# EAGLE board protomesure2 (EAGLE 8.2.0)
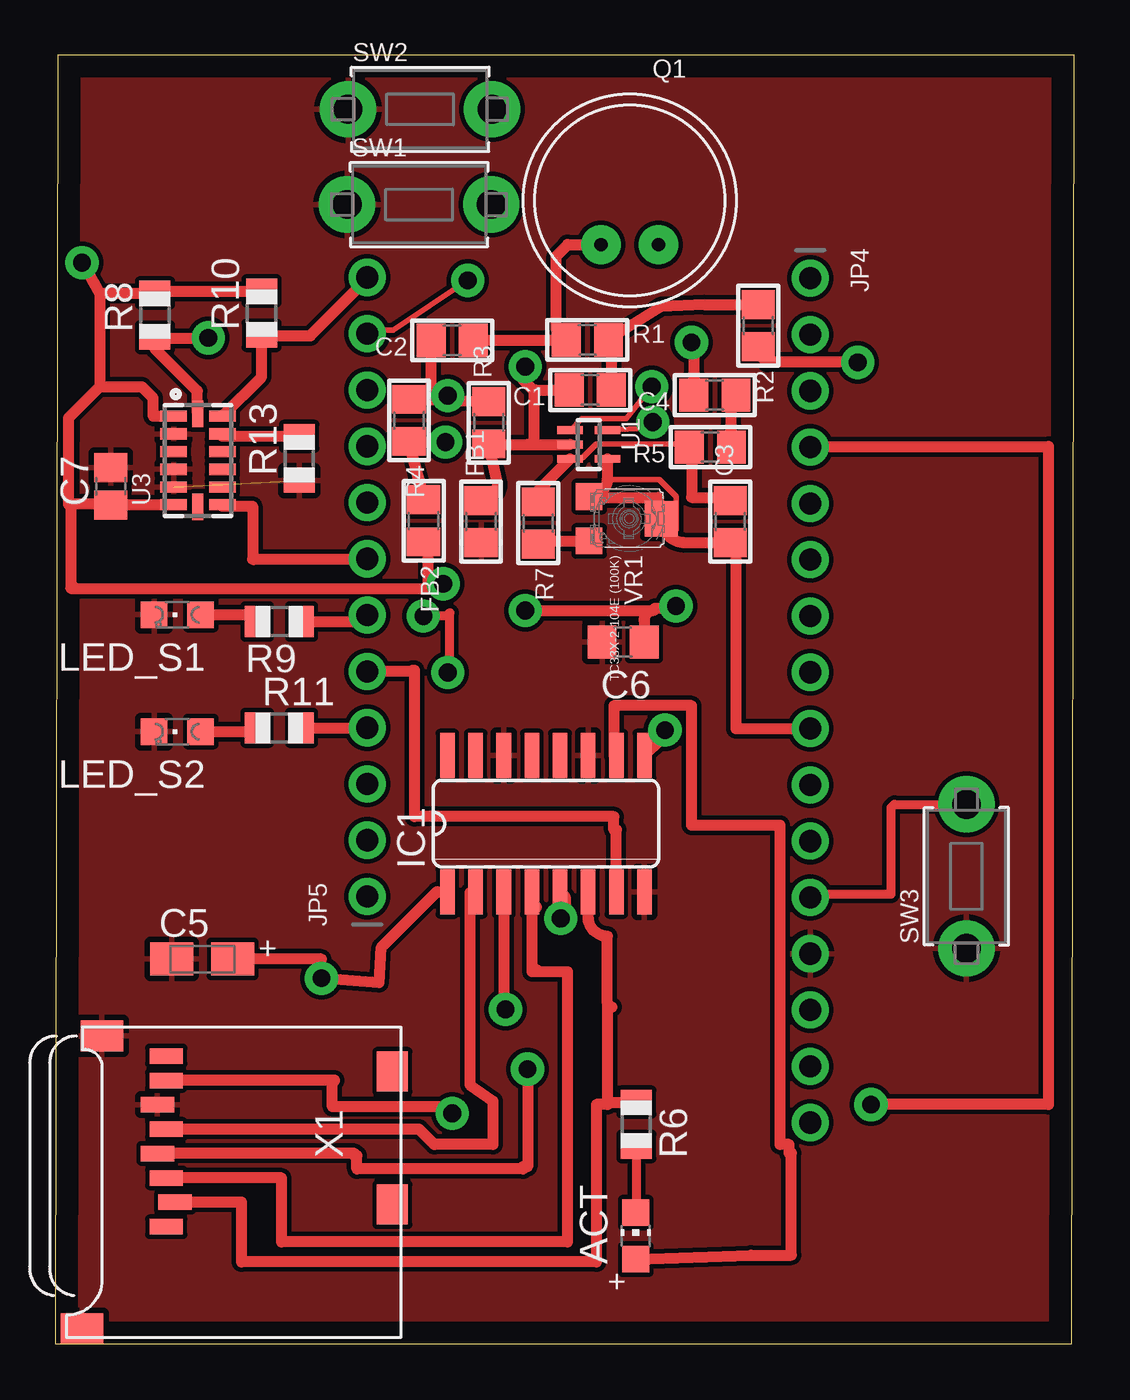
[diagram p0: board, top side]
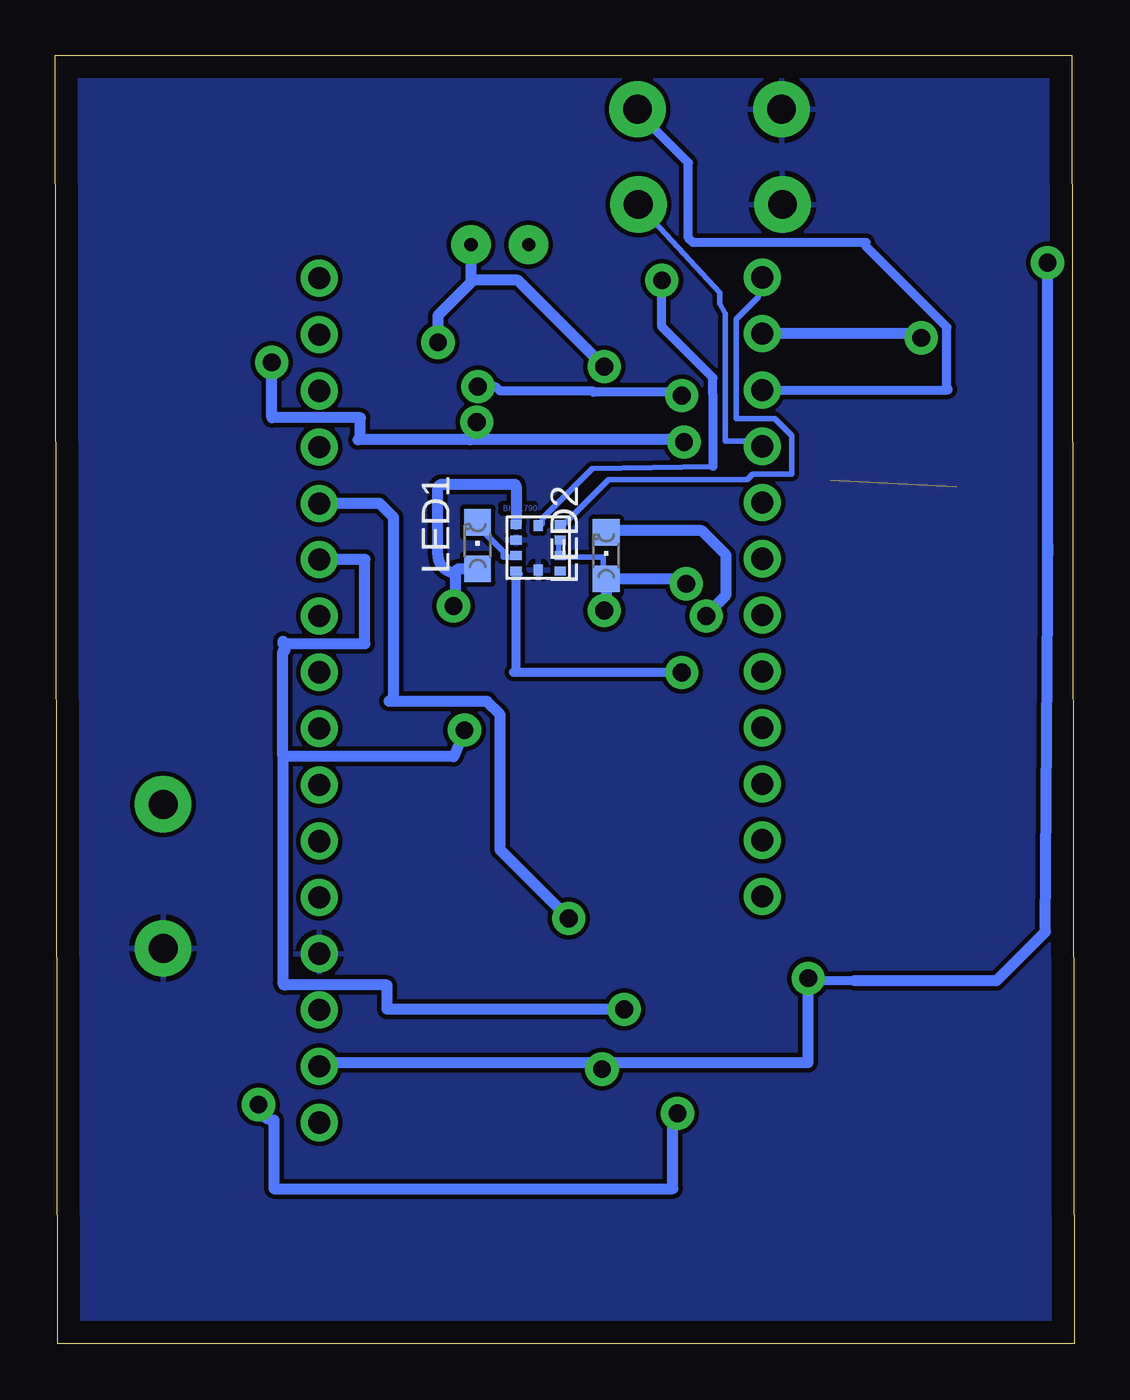
[diagram p1: board, bottom side, seen from below]

Size 45.96 x 58.15 mm. Coordinates in mm from the lower left corner, seen from the top.
Outline: 0,0 45.86,0 45.96,58.15 0.1,58.15 0,0
Copper layers (1*16): Top 0.035mm / dielectric 1.5mm / Bottom 0.035mm
Design rules "default": minimum track width 10mil, minimum drill 24mil, track to track 8mil, track to pad 8mil, pad to pad 8mil, via to via 8mil, smd to smd 8mil, copper to edge 40mil, drill to drill 8mil, minimum pad ring 10mil, minimum via ring 8mil, stop-mask expansion 4mil, vias tented up to drill 0mil, thermal gap 10mil

## Footprints (pad centres in the part's own frame; a part is rotated, then mirrored left to right if it is on the bottom)
CHIP-LED0805 = smd 1.2 x 1.2: A 0,-1.05; C 0,1.05
0805 = smd 1.3 x 1.5: 1 -0.95,0; 2 0.95,0
A/3216-18R = smd 1.95 x 1.5: + 1.375,0; - -1.375,0
C0805 = smd 1.3 x 1.5: 1 -0.95,0; 2 0.95,0
C0805' = smd 1.3 x 1.5: 1 -0.85,0; 2 0.85,0
SO16 = smd 0.66 x 2.032: 1 -4.445,-3.073; 2 -3.175,-3.073; 3 -1.905,-3.073; 4 -0.635,-3.073; 5 0.635,-3.073; 6 1.905,-3.073; 7 3.175,-3.073; 8 4.445,-3.073; 9 4.445,3.073; 10 3.175,3.073; 11 1.905,3.073; 12 0.635,3.073; 13 -0.635,3.073; 14 -1.905,3.073; 15 -3.175,3.073; 16 -4.445,3.073
1X16_ROUND = drill 1 pad 1.676: 1 -19.05,0; 2 -16.51,0; 3 -13.97,0; 4 -11.43,0; 5 -8.89,0; 6 -6.35,0; 7 -3.81,0; 8 -1.27,0; 9 1.27,0; 10 3.81,0; 11 6.35,0; 12 8.89,0; 13 11.43,0; 14 13.97,0; 15 16.51,0; 16 19.05,0
1X12_ROUND = drill 1 pad 1.676: 1 -13.97,0; 2 -11.43,0; 3 -8.89,0; 4 -6.35,0; 5 -3.81,0; 6 -1.27,0; 7 1.27,0; 8 3.81,0; 9 6.35,0; 10 8.89,0; 11 11.43,0; 12 13.97,0
CHIPLED_0805 = smd 1.2 x 1.2: A 0,-1.05; C 0,1.05
ELECTRET_9.7 = drill 0.6 pad 1.778: + 1.3,2; - -1.3,2
R0805 = smd 1.1 x 1.4: 1 -1,0; 2 1,0
TACT_PANA-EVQ = drill 1.3 pad 2.54: P$1 -3.25,0; P$2 3.25,0
SC70-5 = smd 0.35 x 1.15: 1 -0.65,-0.85; 2 0,-0.85; 3 0.65,-0.85; 4 0.65,0.85; 5 -0.65,0.85
LGA14 = smd 0.5 x 1.2: 1 2,1.1; 2 1.2,1.1; 3 0.4,1.1; 4 -0.4,1.1; 5 -1.2,1.1; 6 -2,1.1; 8 -2,-1.1; 9 -1.2,-1.1; 10 -0.4,-1.1; 11 0.4,-1.1; 12 1.2,-1.1; 13 2,-1.1 | smd 1.2 x 0.5: 7 -2.1,0; 14 2.1,0
BH1790 = smd 0.5 x 0.4: GND -1,0.35; LED1 -1,-0.35; LED2 -1,-1.05; SDA 1,1.05; TEST2 1,-0.35; TEST3 1,-1.05; VCC -1,1.05; VCC2 1,0.35 | smd 0.4 x 0.5: SCL 0,1; TEST1 0,-1
TRIMPOT_BOURNS_TC33X-2 = smd 1.2 x 1.2: 1 -1,-1.8; 3 1,-1.8 | smd 1.6 x 1.5: 2 0,1.45
MICROSD = smd 0.7 x 1.5: 1 9,-10.64; 2 7.9,-10.24; 3 6.8,-10.64; 4 5.7,-11.04; 5 4.6,-10.64; 6 3.5,-11.04; 7 2.4,-10.64; 8 1.3,-10.64 | smd 1.8 x 1.4: CD1 2,-0.44; CD2 8,-0.44 | smd 1.4 x 1.9: MT1 0.4,-13.54; MT2 13.6,-14.44

## Placement (x,y rotation side)
ACT  RED  [CHIP-LED0805]  26.18,4.87 0 top
C1  0.1µF  [0805]  24.13,43.05 180 top
C2  0.01uF  [0805]  17.9,45.29 180 top
C3  100pF  [0805]  30.45,37.11 90 top
C4  10uF  [0805]  29.75,42.82 180 top
C5  10uF/10V  [A/3216-18R]  6.62,17.37 0 top
C6  [C0805]  25.61,31.67 180 top
C7  0.1uF  [C0805']  2.5,38.7 90 top
FB1  FERRITE  [0805]  19.2,37.11 90 top
FB2  FERRITE  [0805]  16.61,37.15 270 top
IC1  4050D  [SO16]  22.13,23.48 0 top
JP4  [1X16_ROUND]  34.05,29.04 270 top
JP5  [1X12_ROUND]  14.07,34.16 90 top
LED1  [CHIPLED_0805]  26.91,36.03 0 bottom
LED2  [CHIPLED_0805]  21.11,35.57 0 bottom
LED_S1  [CHIPLED_0805]  5.5,32.91 90 top
LED_S2  [CHIPLED_0805]  5.5,27.63 90 top
Q1  CMA-4544PF-W  [ELECTRET_9.7]  25.91,51.61 180 top
R1  1K  [0805]  24,45.31 0 top
R2  1K  [0805]  31.71,45.95 270 top
R3  1M  [0805]  19.55,41.57 90 top
R4  1M  [0805]  15.95,41.68 270 top
R5  1K  [0805]  29.55,40.47 180 top
R6  1K  [R0805]  26.21,9.91 270 top
R7  22K  [0805]  21.78,37.05 270 top
R8  10K  [R0805]  4.49,46.43 90 top
R9  10K  [R0805]  10.1,32.6 180 top
R10  10K  [R0805]  9.3,46.52 90 top
R11  10K  [R0805]  10.1,27.8 0 top
R13  10K  [R0805]  11,39.96 90 top
SW1  [TACT_PANA-EVQ]  16.41,51.42 0 top
SW2  [TACT_PANA-EVQ]  16.45,55.72 0 top
SW3  [TACT_PANA-EVQ]  41.1,21.1 90 top
U1  MAX4466EXK+T  [SC70-5]  24.06,40.59 270 top
U3  [LGA14]  6.43,39.87 90 top
U$31  BH1790  [BH1790]  24.18,35.93 0 bottom
VR1  TC33X-2-104E (100K)  [TRIMPOT_BOURNS_TC33X-2]  25.88,37.24 270 top
X1  MICROSD  [MICROSD]  15.64,14.29 270 top

## Library data of the parts
ACT C5 C7 LED1 LED2 LED_S1 LED_S2 R6 R8-R11 R13 SW1-SW3 X1 = adafruit
C1-C4 FB1 FB2 JP4 JP5 Q1 R1-R5 R7 U1 U3 VR1 = microbuilder
C6 = resistor
IC1 = 40xx
U$31 = quentin

## Nets
!RESET: JP4.16
+3V3: C5.+ C6.1 C7.1 FB2.2 IC1.1 JP4.15 LED1.A LED2.A R8.2 R10.2 U3.1 U3.6 U$31.TEST2 U$31.VCC U$31.VCC2 X1.4
A0: JP4.12 SW3.P$2
A1: JP4.11
A2: JP4.10
A3: C3.1 JP4.9 U1.4 VR1.1 VR1.2
A4: JP4.8
A5: JP4.7
AGND: C1.2 C4.2 FB1.2 Q1.- R3.1 U1.2
AREF: JP4.14
AVCC: FB2.1 R2.2 R4.2 U1.5
D0: JP4.3
D1: JP4.2
D5: JP5.10 SW2.P$2
D6: JP5.9 SW1.P$2
D9: JP5.8
D10: JP5.7 U3.8
D11: JP5.6 R9.1
D12: IC1.7 JP5.5
D13: JP5.4 R11.2
DFU: JP4.1
EN: JP5.2
GND: C5.- C6.2 C7.2 FB1.1 IC1.8 IC1.11 IC1.14 JP4.13 LED_S1.C LED_S2.C R13.1 SW1.P$1 SW2.P$1 SW3.P$1 U3.2 U3.4 U3.5 U$31.GND U$31.TEST1 X1.6 X1.MT1 X1.MT2
INT2: U3.9
MISO: JP4.4 X1.7
MOSI: IC1.5 JP4.5
N$1: C3.2 R5.2 R7.1 U1.3
N$2: R7.2 VR1.3
N$3: C2.1 Q1.+ R1.1
N$4: C1.1 R1.2 R2.1
N$5: C2.2 R3.2 R4.1 U1.1
N$6: LED1.C U$31.LED1
N$7: C4.1 R5.1
N$8: ACT.A IC1.10
N$9: IC1.2 X1.5
N$10: IC1.6 R6.1 X1.2
N$11: ACT.C R6.2
N$12: IC1.4 X1.3
N$14: LED2.C U$31.LED2
N$15: LED_S1.A R9.2
N$16: LED_S2.A R11.1
SCK: IC1.3 IC1.9 JP4.6
SCL: JP5.11 R8.1 U3.14 U$31.SCL
SDA: JP5.12 R10.1 U3.13 U$31.SDA
SDO/ADDR: R13.2 U3.12
VBAT: JP5.1
VBUS: JP5.3

## Tracks (layer width: path | path; a pad name or v marks a point on that pad's centre or on a via)
+3V3  (via drill 0.8 pad 1.5)
  Top 0.254: FB2.2 16.75,36 16.75,35.75 16.8,35.6
  Top 0.5: U3.6 2.52,37.87 C7.1 2.45,37.9 0.6,37.9 | 0.6,37.9 0.6,41.8 2,43.2 | 2,43.2 3.9,43.2 4.4,42.7 4.4,41.9 4.43,41.87 U3.1 | 2,47.4 2,43.2 | 2,47.4 2.03,47.43 R8.2 4.58,47.52 R10.2 | v1.2,48.8 2,47.4 | 0.6,37.9 arc-90 0.7,37.8 0.7,34.1 | 0.7,34.1 arc-90 0.8,34.2 | 16.8,35.6 16.8,34.3 16.9,34.3 17.5,34.4 | IC1.1 17.21,20.41 14.7,17.9 14.6,16.3 v12,16.5 12,17.37 C5.+ | 17.5,34.4 v17.5,34.3 | v21.2,33.1 27,33.1 | 27,33.1 arc90 26.56,32.66 C6.1 | 27,33.1 arc-90 27.1,33.2 28.1,33.2 arc-90 v28,33.3 | v21.3,12.4 21.3,8 21.1,8 21.1,7.9 13.6,7.9 13.6,8.5 13.5,8.5 13.5,8.59 X1.4 | 0.7,34.1 17.2,34.1 17.5,34.4
  Bottom 0.254: U$31.VCC2 23.25,36.25 23.25,35.75 U$31.TEST2 23,35.5 21.25,35.5 21.25,34.75 LED2.A
  Bottom 0.406: v12,16.5 12,16.4 9.9,16.4
  Bottom 0.5: 34,12.4 34.1,12.5 34.08,12.5 JP4.15 34.05,12.7 21.2,12.7 | 21.2,12.7 12,12.7 v12,16.5 | 1.2,36.1 1.2,35.6 | 1.2,36.1 v1.2,48.8 | v17.5,34.3 17.72,34.52 LED2.A 21.11,33.2 21.3,33.2 arc90 v21.2,33.1 | v28,33.3 arc-90 27.9,33.4 27.9,34.8 | 27.9,34.8 arc90 27.72,34.98 LED1.A | 27.9,34.8 arc90 28.7,35.6 28.7,38.6 arc90 28.5,38.8 25.3,38.8 arc90 25.18,38.68 U$31.VCC | 21.2,12.7 21.2,12.4 v21.3,12.4 | 9.9,16.4 3.5,16.4 1.3,18.6 1.2,33.4 1.2,36.1
A0
  Top 0.406: JP4.12 34.2,20.3 37.7,20.3 37.7,24.2 37.85,24.35 SW3.P$2
A3
  Top 0.254: 24.91,39.07 25,39 27.25,39 28,38.25 28,36.75 27.75,36.75 VR1.2
  Top 0.5: VR1.2 arc90 28.41,36.16 C3.1 30.7,35.91 30.7,27.77 JP4.9 | VR1.1 arc90 24.91,39.07 U1.4
AGND  (via drill 0.8 pad 1.5)
  Top 0.5: FB1.2 arc90 19.95,38.81 R3.1 arc90 20.08,40.59 21.3,40.59 | 21.3,40.59 U1.2 | 21.3,40.59 arc90 21.6,40.89 21.6,43 | 21.6,43 arc-90 21.65,43.05 C1.2 | 21.6,43 21.1,43.5 21.1,43.7 21.2,43.8 v21.2,44.1 | v28.7,45.2 28.8,45.1 C4.2
  Bottom 0.5: v21.2,44.1 25.1,48 27.1,48 | 27.1,48 27.2,48.1 27.2,49.1 27.21,49.11 Q1.- | 27.1,48 28.7,46.4 v28.7,45.2
AVCC  (via drill 0.8 pad 1.5)
  Top 0.254: v26.95,41.6 27.1,41.35 25,41.25 U1.5
  Top 0.5: FB2.1 arc90 16.65,38.14 R4.2 15.98,40.7 v17.6,40.7 | v36.2,44.3 32.1,44.3 31.71,44.69 R2.2
  Bottom 0.254: 27.25,40.8 v26.95,41.6
  Bottom 0.5: v17.6,40.7 17.7,40.8 27.25,40.8 32.3,40.8 32.2,40.9 32.2,41.8 36.2,41.8 v36.2,44.3
D5
  Bottom 0.254: 14,43.25 JP5.10 | SW2.P$2 19.5,55.5
  Bottom 0.406: JP5.10 5.7,43.05 5.7,43.1 5.74,43.14 5.74,45.88 9.4,49.53 9.4,49.7 17.2,49.7 17.4,49.9 17.4,53.3 19.7,55.6 SW2.P$2
D6
  Bottom 0.254: JP5.9 14.25,40.75 15.75,40.75 15.75,46.5 16,46.95 16,47.45 19.5,51.25 SW1.P$2
D10
  Top 0.5: U3.8 7.53,37.8 8.9,37.8 8.9,35.4 9,35.4 9,35.43 JP5.7
D11
  Top 0.5: R9.1 13.78,32.6 JP5.6
D12
  Top 0.5: IC1.7 25.3,23.2 25.2,23.2 25.2,23.8 16.2,23.8 16.2,30.4 16.1,30.4 16.1,30.35 JP5.5
D13
  Top 0.5: R11.2 JP5.4
GND  (1 unrouted)
  pour Top (isolate 0.2): 0,0 46,0 46,58 0,58
  pour Bottom (isolate 0.2): 0,0 46,0 46,58 0,58
MISO  (via drill 0.8 pad 1.5)
  Top 0.5: JP4.4 34.05,40.5 44.8,40.5 44.8,10.8 v36.8,10.8 | v17.9,10.4 17.9,10.7 12.5,10.7 12.5,11.9 12.6,11.9 12.6,11.89 X1.7
  Bottom 0.5: v36.8,10.8 arc-90 36.1,10.1 36.1,7 18.1,7 18.1,10.4 v17.9,10.4
MOSI  (via drill 0.8 pad 1.5)
  Top 0.5: IC1.5 23,20.17 23,19.3 22.9,19.2 v22.8,19.2
  Bottom 0.5: v22.8,19.2 25.9,22.3 25.9,28.4 26.5,29 30.9,29 30.7,29.2 30.7,37.3 31.33,37.93 JP4.5
N$1
  Top 0.25: R5.2 28.47,40.6 24.4,40.6 23.8,40 | 23.75,40 23.7,40
  Top 0.254: U1.3 23.25,40 23.75,40 23.8,40
  Top 0.5: 28.7,40.37 arc90 R5.2 arc-90 28.7,40.37 | 28.7,40.37 28.7,40.3 28.7,38.2 30.31,38.2 arc-90 C3.2 | U1.3 21.78,38.51 R7.1
N$2
  Top 0.5: R7.2 arc-90 21.92,36.24 VR1.3
N$3
  Top 0.5: C2.1 arc-90 18.87,45.31 R1.1 22.6,45.76 22.6,49.1 23.11,49.61 Q1.+
N$4
  Top 0.5: C1.1 25.08,45.18 arc90 R1.2 arc-90 25.04,45.4 27.3,46.8 29.3,46.9 R2.1
N$5  (via drill 0.8 pad 1.5, 0.81 pad 1.5)
  Top 0.254: v26.9,43.2 25.75,41.75 23.75,41.75 23.25,41.25 U1.1 | v17.7,42.8 18,42.57
  Top 0.5: R3.2 18,42.57 16.66,42.62 arc-90 R4.1 arc90 16.95,42.93 C2.2
  Bottom 0.406: v17.7,42.8 17.84,42.94 21.68,42.94 21.73,43 25.9,43 26.1,43.2 v26.9,43.2
N$6
  Bottom 0.254: U$31.LED1 25.25,35.5 25.75,35.5 25.75,35.75 26.75,36.75 26.75,37 LED1.C
N$7
  Top 0.5: R5.1 30.5,42.62 arc-90 C4.1
N$8
  Top 0.5: ACT.A 31.38,4 33.2,4 33.2,8.6 33.1,8.6 33.1,9 32.7,9 32.7,23.4 28.7,23.4 28.7,28.8 25.2,28.8 25.2,26.55 IC1.10
N$9
  Top 0.5: IC1.2 18.7,20.36 18.7,11.7 19.74,10.96 19.74,9 17.1,9 16.41,9.69 X1.5
N$10
  Top 0.5: 25.1,15.2 arc-90 24.9,15.4 | 24.9,15.4 24.9,18.4 arc-90 24.04,19.27 IC1.6 | 24.9,15.4 24.9,10.91 | 24.9,10.91 R6.1 | 24.9,10.91 24.9,10.8 24.4,10.8 24.4,3.7 8.4,3.7 8.4,6.4 8.4,6.39 X1.2
N$11
  Top 0.406: R6.2 26.21,5.92 ACT.C
N$12
  Top 0.5: 21.7,19.7 arc-90 21.5,19.8 IC1.4 21.5,16.9 | 21.5,16.9 21.7,16.9 | 21.5,16.9 21.5,16.8 23.1,16.8 23.1,4.6 10.2,4.6 10.2,7.49 X1.3
N$13
  Top 0.5: 24.1,38.2 27.2,38.2 27.2,37.3
N$14  (via drill 0.8 pad 1.5)
  Top 0.406: v17.7,30.3 17.8,30.4 17.8,33 17.65,32.85 v16.6,32.85
  Bottom 0.254: U$31.LED2 25,34.75
  Bottom 0.406: v17.7,30.3 25.3,30.3 25.18,30.42 U$31.LED2
  Bottom 0.5: v16.6,32.85 16.6,32.9 15.7,33.8 15.7,35.6 16.8,36.7 21.03,36.7 LED2.C
N$15
  Top 0.5: LED_S1.A 8.79,32.91 R9.2
N$16
  Top 0.5: LED_S2.A 8.93,27.63 R11.1
SCK  (via drill 0.8 pad 1.5)
  Top 0.5: IC1.3 20.23,15.28 arc90 v20.3,15.1 | IC1.9 27.3,27.28 27.6,27.7 v27.5,27.7
  Bottom 0.5: v20.3,15.1 30.9,15.1 arc-90 31,15.1 31,16.2 35.6,16.2 arc90 35.7,16.3 35.7,26.5 | 35.7,31.6 arc90 35.6,31.4 35.6,31.3 arc-90 35.7,31.2 35.7,26.5 | 35.7,31.7 35.7,31.6 | 35.7,31.6 32,31.6 32,35.4 JP4.6 arc-90 JP4.6 | v27.5,27.7 28,26.5 35.7,26.5
SCL  (via drill 0.8 pad 1.5)
  Top 0.254: v18.6,48 15.25,45.75 14.25,45.75 JP5.11
  Top 0.5: U3.14 6.4,42 6.4,43 4.49,44.91 R8.1 4.52,45.4 v6.9,45.4
  Bottom 0.254: 16.3,39.6 21.75,39.5 24,37.25 24,37 U$31.SCL
  Bottom 0.406: 16.3,39.6 16.28,39.62 16.28,42.8 16.3,42.82 16.3,43.6 18.6,45.9 v18.6,48
  Bottom 0.5: v6.9,45.4 7.09,45.59 JP5.11
SDA
  Top 0.5: JP5.12 14.07,48.07 11.5,45.5 9.32,45.5 R10.1 9.3,43.64 U3.13
  Bottom 0.254: U$31.SDA 23,37 21,39 14.75,39 14.5,39.25 12.75,39.25 12.75,41 13.5,41.75 15.25,41.75 15.25,46.25 14.25,47.25 14.25,48 JP5.12
SDO/ADDR
  Top 0.5: U3.12 7.53,40.96 R13.2